# Altium PCB Resonate.PcbDoc
Units mil, origin at the board's own origin, x right, y up, seen from the top; angles counter-clockwise.
Board outline 3841 x 2404 mil, 2 copper layers (Top Layer, Bottom Layer); 119 components, 60 nets, 316 pads, 93 vias.
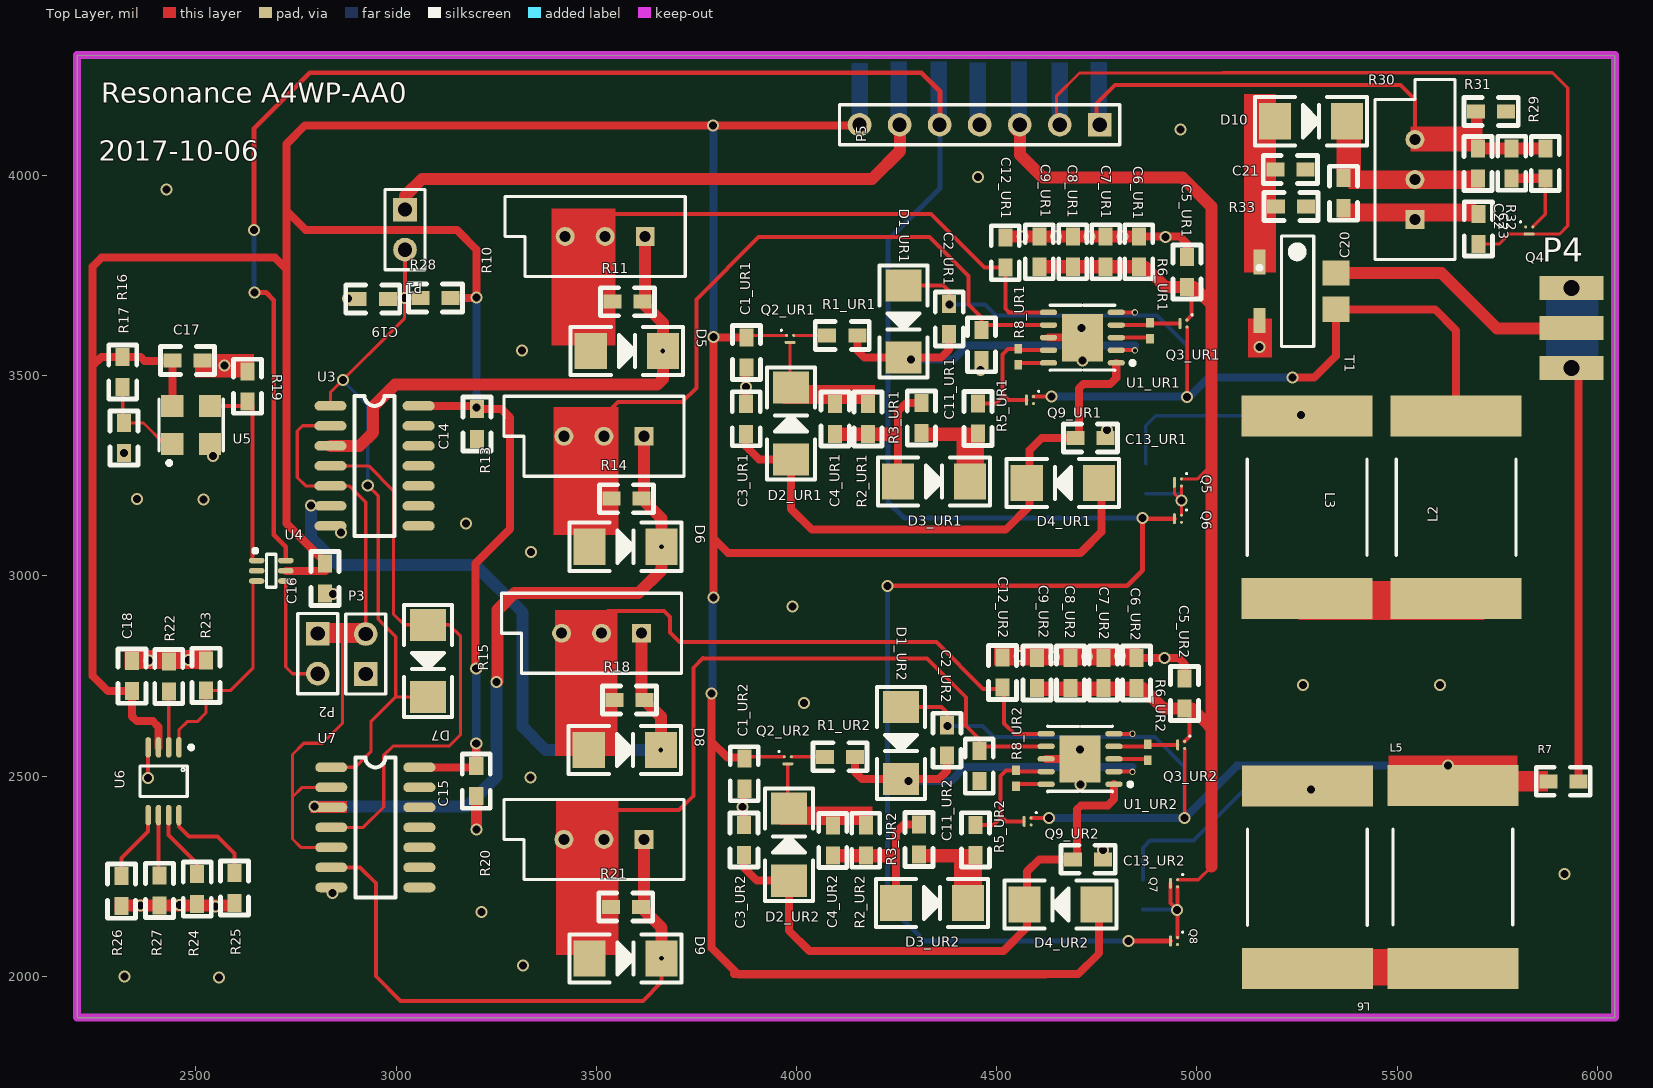
[diagram p0: Top Layer view]
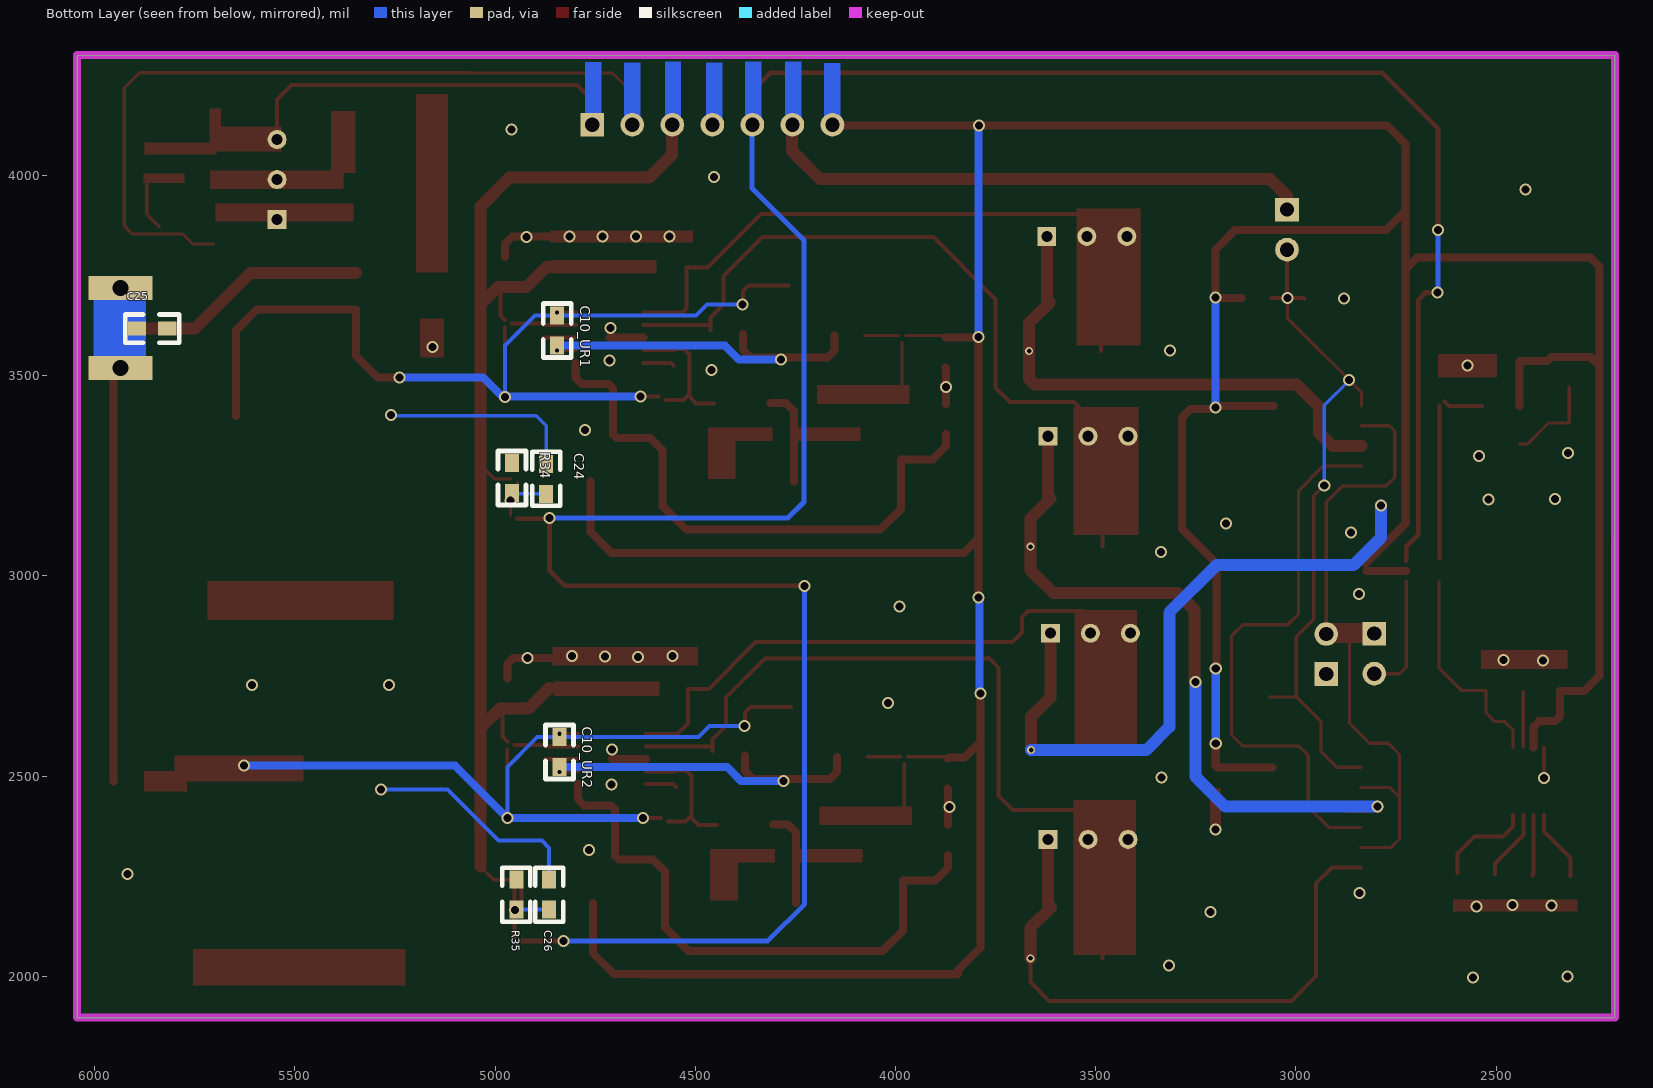
[diagram p1: Bottom Layer view, seen from below]

## Layer stack, top to bottom
Top Layer: signal copper 1.4
Dielectric: dielectric 12.6, FR-4, Dk 4.8
Bottom Layer: signal copper 1.4

## Board outline
2203,4301 2203,1899 2205,1897 6044,1897 6044,4299

## Design rules (kind name [scope] priority, off if disabled: settings)
Clearance [All] p1: gap=6
ComponentClearance [All] p1: gap=0 collisioncheckmode=3 verticalgap=0 showdistances=FALSE
HoleToHoleClearance [All] p1: gap=4 allowstackedmicrovias=TRUE
MinimumSolderMaskSliver [All] p1: minsoldermaskwidth=3
PolygonConnect [All] p1: connectstyle=Relief reliefconductorwidth=10 reliefentries=4 polygonreliefangle="90 Angle"
RoutingVias [All] p1: holewidth=10 width=16 viastyle="Through Hole" minholewidth=8 minwidth=10 maxholewidth=28 maxwidth=50
SilkToSilkClearance [All] p1: silktosilkclearance=0
SilkscreenOverComponentPads [All] p1: minsilkscreentomaskgap=0
SolderMaskExpansion [All] p1: expansion=4
Width [All] p1: maxlimit=50 minlimit=6 preferedwidth=10
23 further rules are at their usual default settings.

## Classes and differential pairs
component class U_Oscillating: C14 C15 C16 C17 C18 C19 D5 D6 D7 D8 D9 P1 P2 P3 R10 R11 R13 R14 R15 R16 R17 R18 R19 R20 R21 R22 R23 R24 R25 R26 R27 R28 U3 U4 U5 U6 U7
component class Resonance-AA0: C20 C21 C22 C23 C24 C25 C26 D10 L2 L3 L5 L6 P4 P5 Q4 Q5 Q6 Q7 Q8 R7 R29 R30 R31 R32 R33 R34 R35 T1
channel class GateDriverAndPowerDevices: UR1_ UR2_
component class UR1: C1_UR1 C2_UR1 C3_UR1 C4_UR1 C5_UR1 C6_UR1 C7_UR1 C8_UR1 C9_UR1 C10_UR1 C11_UR1 C12_UR1 C13_UR1 D1_UR1 D2_UR1 D3_UR1 D4_UR1 Q2_UR1 Q3_UR1 Q9_UR1 R1_UR1 R2_UR1 R3_UR1 R5_UR1 R6_UR1 R8_UR1 U1_UR1
component class UR2: C1_UR2 C2_UR2 C3_UR2 C4_UR2 C5_UR2 C6_UR2 C7_UR2 C8_UR2 C9_UR2 C10_UR2 C11_UR2 C12_UR2 C13_UR2 D1_UR2 D2_UR2 D3_UR2 D4_UR2 Q2_UR2 Q3_UR2 Q9_UR2 R1_UR2 R2_UR2 R3_UR2 R5_UR2 R6_UR2 R8_UR2 U1_UR2

## Components (designator, comment, footprint, x,y, rotation, side; value= is the part's Value field where it differs from the comment)
C1_UR1 "100n/25V" 0603 3875.28,3560.93 r270 top (schematic designator C1)
C1_UR2 "100n/25V" 0603 3869.45,2508.55 r270 top (schematic designator C1)
C2_UR1 "100n/25V" 0603 4381.26,3639.54 r90 top (schematic designator C2)
C2_UR2 "100n/25V" 0603 4375.43,2587.16 r90 top (schematic designator C2)
C3_UR1 "100n/25V" 0603 3874.24,3390.11 r90 top (schematic designator C3)
C3_UR2 "100n/25V" 0603 3868.42,2337.74 r90 top (schematic designator C3)
C4_UR1 "22n/25V" 0603 4096.38,3394.34 r270 top (schematic designator C4)
C4_UR2 "22n/25V" 0603 4090.55,2341.96 r270 top (schematic designator C4)
C5_UR1 "1u/10V" 0603 4974.94,3761.48 r270 top (schematic designator C5)
C5_UR2 "1u/10V" 0603 4969.11,2709.1 r270 top (schematic designator C5)
C6_UR1 "1u/10V" 0603 4854.88,3812.29 r270 top (schematic designator C6)
C6_UR2 "1u/10V" 0603 4849.05,2759.92 r270 top (schematic designator C6)
C7_UR1 "1u/10V" 0603 4772.11,3812.29 r270 top (schematic designator C7)
C7_UR2 "1u/10V" 0603 4766.28,2759.92 r270 top (schematic designator C7)
C8_UR1 "1u/10V" 0603 4689.94,3812.29 r270 top (schematic designator C8)
C8_UR2 "1u/10V" 0603 4684.11,2759.92 r270 top (schematic designator C8)
C9_UR1 "1u/10V" 0603 4606.27,3812.29 r270 top (schematic designator C9)
C9_UR2 "1u/10V" 0603 4600.44,2759.92 r270 top (schematic designator C9)
C10_UR1 "1u/10V" 0603 4844.85,3610.29 r90 bottom (schematic designator C10)
C10_UR2 "1u/10V" 0603 4839.02,2557.92 r90 bottom (schematic designator C10)
C11_UR1 "22p/50V" 0603 4462.16,3579.9 r270 top (schematic designator C11)
C11_UR2 "22p/50V" 0603 4456.33,2527.52 r270 top (schematic designator C11)
C12_UR1 "22p/50V" 0603 4521.33,3804.95 r90 top (schematic designator C12)
C12_UR2 "22p/50V" 0603 4514.7,2756.7 r90 top (schematic designator C12)
C13_UR1 "1u/10V" 0603 4731.59,3344.76 r0 top (schematic designator C13)
C13_UR2 "1u/10V" 0603 4725.76,2292.38 r0 top (schematic designator C13)
C14 "100n/50V" 0603 3202,3377 r90 top
C15 "100n/50V" 0603 3200,2485 r90 top
C16 "100n/50V" 0603 2822,2991 r90 top
C17 "100n/50V" 0603 2481,3538 r180 top
C18 "100n/50V" 0603 2340.08,2752.27 r270 top
C19 "22p/50V" 0603 2944,3692 r180 top
C20 "1n/50V" 0603 5366.34,3953.41 r90 top
C21 "680p/50V" 0603 5230.77,4015.09 r0 top
C22 "82n/16V" 0603 5786.1,4028.18 r90 top
C23 "1n/50V" 0603 5702.89,3869.5 r270 top
C24 "1u/50V" 0603 4872.24,3245.2 r270 bottom
C25 "JMP 1" 0603 5858.79,3617.69 r180 bottom
C26 "1u/50V" 0603 4864.87,2206.46 r270 bottom
D1_UR1 "Diode BAS70" SMA 4267.14,3725.12 r270 top (schematic designator D1)
D1_UR2 "Diode BAS70" SMA 4261.31,2672.75 r270 top (schematic designator D1)
D2_UR1 "Diode" SMA 3986.51,3291.17 r90 top (schematic designator D2)
D2_UR2 "Diode" SMA 3980.69,2238.8 r90 top (schematic designator D2)
D3_UR1 "Diode" SMA 4253.73,3235.91 r0 top (schematic designator D3)
D3_UR2 "Diode" SMA 4247.9,2183.53 r0 top (schematic designator D3)
D4_UR1 "Diode" SMA 4754.97,3232.03 r180 top (schematic designator D4)
D4_UR2 "Diode" SMA 4749.14,2179.65 r180 top (schematic designator D4)
D5 "Diode" SMA 3486,3562 r0 top
D6 "Diode" SMA 3483,3073 r0 top
D7 "Diode" SMA 3079,2878 r270 top
D8 "Diode" SMA 3481,2565 r0 top
D9 "Diode" SMA 3483,2045 r0 top
D10 "Diode" SMA 5194.66,4135.72 r0 top
L2 "Inductor" INDP12274X23N 5647.4,3171.71 r90 top
L3 "Inductor" INDP12274X23N 5275.16,3171.71 r270 top
L5 "Inductor" INDP12274X23N 5639.26,2248.05 r90 top
L6 "Inductor" INDP12274X23N 5275.75,2247.5 r270 top
P1 "Header 2" HDR1X2 3022,3915 r270 top
P2 "Header 2" HDR1X2 2804,2856 r270 top
P3 "Header 2" HDR1X2 2924,2755 r90 top
P4 "SMB" CONSMA003.062 5935.88,3619.8 r0 top
P5 "Header 7" HDR1X7 4757.31,4126.96 r180 top
Q2_UR1 "EPC2038" BGA100P9X9-81A 3983.97,3591.98 r0 top (schematic designator Q2)
Q2_UR2 "EPC2038" BGA100P9X9-81A 3978.14,2539.61 r0 top (schematic designator Q2)
Q3_UR1 "EPC2036" BGA100P9X9-81A 4966.41,3630.54 r270 top (schematic designator Q3)
Q3_UR2 "EPC2036" BGA100P9X9-81A 4960.58,2578.16 r270 top (schematic designator Q3)
Q4 "EPC2038" BGA100P9X9-81A 5830.04,3862.88 r0 top
Q5 "EPC2036" BGA100P9X9-81A 4952.54,3233.65 r270 top
Q6 "EPC2036" BGA100P9X9-81A 4952.61,3142.93 r270 top
Q7 "EPC2036" BGA100P9X9-81A 4942.77,2232.42 r270 top
Q8 "EPC2036" BGA100P9X9-81A 4942.68,2088.43 r270 top
Q9_UR1 "EPC2036" BGA100P9X9-81A 4582.95,3439.33 r270 top (schematic designator Q9)
Q9_UR2 "EPC2036" BGA100P9X9-81A 4577.12,2386.95 r270 top (schematic designator Q9)
R1_UR1 "Res1" 0603 4116.63,3600.63 r180 top (schematic designator R1)
R1_UR2 "Res1" 0603 4110.8,2548.26 r180 top (schematic designator R1)
R2_UR1 "Res1" 0603 4178.72,3389.76 r90 top (schematic designator R2)
R2_UR2 "Res1" 0603 4172.89,2337.38 r90 top (schematic designator R2)
R3_UR1 "Res1" 0603 4311.66,3391.83 r90 top (schematic designator R3)
R3_UR2 "Res1" 0603 4305.83,2339.45 r90 top (schematic designator R3)
R5_UR1 "Res1" 0603 4452.85,3390.75 r90 top (schematic designator R5)
R5_UR2 "Res1" 0603 4447.02,2338.37 r90 top (schematic designator R5)
R6_UR1 "Res1" 0402 4882.85,3612.29 r90 top (schematic designator R6)
R6_UR2 "Res1" 0402 4877.02,2559.92 r90 top (schematic designator R6)
R7 "Res1" 0603 5912.51,2487.13 r0 top
R8_UR1 "Res1" 0402 4553.85,3547.29 r90 top (schematic designator R8)
R8_UR2 "Res1" 0402 4548.02,2494.92 r90 top (schematic designator R8)
R10 "RPot" VR5 3522,3848 r180 top
R11 "" 0603 3575,3685 r0 top
R13 "RPot" VR5 3519,3349 r180 top
R14 "" 0603 3573,3193 r0 top
R15 "RPot" VR5 3513,2857 r180 top
R16 "Res1" 0603 2317,3507 r90 top
R17 "NC" 0603 2320,3342 r90 top
R18 "" 0603 3580,2690 r0 top
R19 "Res1" 0603 2628.97,3476.24 r270 top
R20 "RPot" VR5 3519,2342 r180 top
R21 "" 0603 3571,2173 r0 top
R22 "" 0603 2432.08,2751.27 r270 top
R23 "Res1" 0603 2525.08,2754.27 r270 top
R24 "" 0603 2503.08,2215.27 r90 top
R25 "" 0603 2596.08,2218.27 r90 top
R26 "" 0603 2314.08,2210.27 r90 top
R27 "" 0603 2409.08,2212.27 r90 top
R28 "Res1" 0603 3096,3694 r0 top
R29 "Res1" 0603 5702.27,4027.53 r90 top
R30 "RPot" VR5 5544.42,3990.15 r90 top
R31 "Res1" 0603 5732.42,4159.82 r0 top
R32 "Res1" 0603 5870.12,4032.88 r270 top
R33 "Res1" 0603 5237.26,3923.08 r180 top
R34 "Res1" 0603 4957.52,3247.26 r270 bottom
R35 "Res1" 0603 4946.98,2206.46 r270 bottom
T1 "Trans Cupl" SOIC127P590X175-4N 5251.56,3711.21 r0 top
U1_UR1 "LM5113TM" QFN80P400X400X80-10N 4713.85,3595.29 r180 top (schematic designator U1)
U1_UR2 "LM5113TM" QFN80P400X400X80-10N 4708.02,2542.92 r180 top (schematic designator U1)
U3 "74LS00" SO-14 2836,3425 r0 top
U4 "74LS157" TSOP65P220X100-6N 2688,3013 r0 top
U5 "SG-8002" SOT192P240X120-4N 2488,3377 r90 top
U6 "DS1090" TSOP65P490X100-8N 2419.08,2487.27 r270 top
U7 "74LS08" SO-14 2838,2522 r0 top

## Footprints (in the part's own frame and the unit in brackets; to place one, negate y for a bottom-side part, rotate by r counter-clockwise, add the part's x,y. Pads: shape width x height; smd on the part's side, far side on the other; paste and mask are expansions set on the pad)
0402 [mm] "Chip Capacitor, Body 1.0x0.5mm, IPC High Density"
  rect 0.6x0.5 smd: 1(-0.5,0) 2(0.5,0)
  body extent -0.55,-0.3 0.55,0.3, height 1.3
0603 [mil]
  rect 45x35 smd: 1(-35,0) 2(40,0)
  silkscreen extent -65,-35 70,35
BGA100P9X9-81A [mm]
  round 0.19 smd mask+0.05: 1(-0.225,0.225)
  oval 0.7x0.19 smd mask+0.05: 2(-0.001,-0.223)
  round 0.19 smd paste+0 mask+0.05: 3(0.225,0.225)
  silkscreen extent -0.6,0.5 -0.51,0.6
CONSMA003.062 [mil] "SMAÁ¬»"
  rect 159.84x60 hole 40: 1(0,-100) 1(0,100)
  rect 159.84x60 smd: 2(0,0)
HDR1X2 [mm] "Connector; Header; 2 Position"
  rect 1.5x1.5 hole 0.9: 1(0,0)
  round 1.5 hole 0.9: 2(2.54,0)
  silkscreen extent -1.27,-1.27 3.81,1.27
HDR1X7 [mm] "Connector; Header; 7 Position"
  rect 1.5x1.5 hole 0.9: 1(0,0)
  round 1.5 hole 0.9: 2(2.54,0) 3(5.08,0) 4(7.62,0) 5(10.16,0) 6(12.7,0) 7(15.24,0)
  silkscreen extent -1.27,-1.27 16.51,1.27
INDP12274X23N [mm] "Precision Wire Wound Inductor, 2-Leads, Body 12.3x7.4mm, IPC Medium Density"
  rect 2.6x8.3 smd: 1(-5.8,0) 2(5.8,0)
  silkscreen extent -3.05,-3.8 3.05,3.8, body extent -6.25,-3.8 6.25,3.8, height 2.29
QFN80P400X400X80-10N [mm] "QFN, 10-Leads, Body 4.1x4.1mm (max), Pitch 0.80mm, IPC Medium Density"
  oval 1.1x0.35 smd: 1(-2.15,1.6) 2(-2.15,0.8) 3(-2.15,0) 4(-2.15,-0.8) 5(-2.15,-1.6) 6(2.15,-1.6) 7(2.15,-0.8) 8(2.15,0) 9(2.15,0.8) 10(2.15,1.6)
  rect 2.6x3 smd: 11(0,0)
  silkscreen extent -3.31,-2.07 2.05,2.08, body extent -2.05,-2.05 2.05,2.05, height 0.8
SMA [mil]
  rect 80x90 smd: 1(0,0) 2(180,0)
  silkscreen extent -50,-60 230,60
SO-14 [mil]
  oval 80x24 smd: 1(0,0) 2(0,-50) 3(0,-100) 4(0,-150) 5(0,-200) 6(0,-250) 7(0,-300) 8(220,-300) 9(220,-250) 10(220,-200) 11(220,-150) 12(220,-100) 13(220,-50) 14(220,0)
  silkscreen extent 60,-325 160,25
SOIC127P590X175-4N [mm] "SOIC, 4-Leads, Body 7.0x5.2mm (max), Pitch 1.27mm, IPC Medium Density"
  rect 0.75x1.6 smd: 1(-2.425,1.85) 2(-2.425,-1.85)
  rect 1.7x1.6 smd: 3(2.425,-1.15) 4(2.425,1.15)
  silkscreen extent -2.55,-3.5 1.03,3.5, body extent -2.6,-3.5 2.6,3.5, height 1.75
SOT192P240X120-4N [mm] "SOT143, 4-Leads, Body 3.3x2.4mm (max), Pitc"
  rect 1.4x1.4 smd: 1(-1.2,1.2) 2(-1.2,-1.2) 3(1.2,-1.2) 4(1.2,1.2)
  silkscreen extent -2.54,-2.03 1.65,2.03, body extent -1.65,-1.65 1.65,1.65, height 1.2
TSOP65P220X100-6N [mm] "TSOP, 6-Leads, Body 2.1x1.3mm (max), Pitc"
  oval 1x0.35 smd: 1(-0.925,0.65) 2(-0.925,0) 3(-0.925,-0.65) 4(0.925,-0.65) 5(0.925,0) 6(0.925,0.65)
  silkscreen extent -1.14,-1.05 0.3,1.39, body extent -0.65,-1.05 0.65,1.05, height 1
TSOP65P490X100-8N [mm] "TSOP, 8-Leads, Body 3.0x3.0mm (max), Pitch 0.65mm, IPC"
  oval 1.3x0.35 smd: 1(-2.15,0.975) 2(-2.15,0.325) 3(-2.15,-0.325) 4(-2.15,-0.975) 5(2.15,-0.975) 6(2.15,-0.325) 7(2.15,0.325) 8(2.15,0.975)
  silkscreen extent -2.27,-1.5 0.97,1.88, body extent -1.5,-1.5 1.5,1.5, height 1
VR5 [mm] "Thru-Hole; 3 Leads"
  rect 1.2x1.2 hole 0.7: 1(-2.54,0)
  round 1.2 hole 0.7: 2(0,0) 3(2.54,0)
  silkscreen extent -5.08,-2.54 6.35,2.54

## Part data
C1_UR1 C1_UR2 C2_UR1 C2_UR2 C3_UR1 C3_UR2 C4_UR1 C4_UR2 C5_UR1 C5_UR2 C6_UR1 C6_UR2 C7_UR1 C7_UR2 C8_UR1 C8_UR2 C9_UR1 C9_UR2 C10_UR1 C10_UR2 C11_UR1 C11_UR2 C12_UR1 C12_UR2 C13_UR1 C13_UR2 C14 C15 C16 C17 C18 C19 C20 C21 C22 C23 C24 C25 C26: library part CAP1, "Capacitor"
D1_UR1 D1_UR2: "Silicon AF Schottky Diode for High-Speed Switching"
D2_UR1 D2_UR2 D3_UR1 D3_UR2 D4_UR1 D4_UR2 D5 D6 D7 D8 D9 D10: "Default Diode"
P1 P2 P3: "Header, 2-Pin"
P4: "SMB Straight Connector"
P5: "Header, 7-Pin"
Q2_UR1 Q2_UR2 Q3_UR1 Q3_UR2 Q4 Q5 Q6 Q7 Q8 Q9_UR1 Q9_UR2: library part MOSFET-N, "N-Channel MOSFET"
R1_UR1 R1_UR2 R2_UR1 R2_UR2 R3_UR1 R3_UR2 R5_UR1 R5_UR2 R6_UR1 R6_UR2 R7 R8_UR1 R8_UR2 R16 R19 R23 R28 R29 R31 R32 R33 R34 R35: "Resistor"
R10 R13 R15 R20 R30: "Potentiometer"
R11 R14 R17 R18 R21 R22 R24 R25 R26 R27: library part Res1, "Resistor"
T1: "Transformer (Coupled Inductor Model)"

## Via types
v1: diameter 30, hole 20, Top Layer to Bottom Layer, 85 vias
v2: diameter 20, hole 12, Top Layer to Bottom Layer, 4 vias
v3: diameter 16, hole 10, Top Layer to Bottom Layer, 4 vias

## Nets (pads, with @x,y where several pads share a name; then routed paths per layer and width w, separated by ;. In a path a pad name is that pad's centre, name@x,y a point inside that pad or via, vN(x,y) a via of type N, cw(c..) or ccw(c..) an arc to the next point about the centre after c; other vN are vias at no path point)
4.7V_UR1: C3_UR1.1 C13_UR1.1 D2_UR1.1 D4_UR1.2 U1_UR1.1 | length 1446.2
  Top Layer w20: C3_UR1.1 3874.24,3323.72 3906.8,3291.17 D2_UR1.1 3986.51,3167.25 4038.24,3115.52 4522.33,3115.52 4581.73,3174.92 4581.73,3314.08 4612.41,3344.76 C13_UR1.1 ; C13_UR1.1@4705.83,3352.54 4705.83,3468.71 4716.77,3479.65 4783.37,3479.65 4798.49,3494.77 U1_UR1.1
4.7V_UR2: C3_UR2.1 C13_UR2.1 D2_UR2.1 D4_UR2.2 U1_UR2.1 | length 1446.2
  Top Layer w20: C3_UR2.1 3868.42,2271.35 3900.97,2238.8 D2_UR2.1 3980.69,2114.87 4032.41,2063.15 4516.5,2063.15 4575.9,2122.55 4575.9,2261.7 4606.58,2292.38 C13_UR2.1 ; C13_UR2.1@4700,2300.16 4700,2416.33 4710.94,2427.28 4777.54,2427.28 4792.66,2442.39 U1_UR2.1
5V: C1_UR1.1 C1_UR2.1 C14.2 C15.2 C16.2 C17.2 C18.2 D4_UR1.1 D4_UR2.1 P5.7 Q2_UR1.1 Q2_UR2.1 R16.2 R28.2 U3.14 U4.5 U5.4 U6.3 U7.14 | length 12535.5
  Top Layer w8: C1_UR2.1 3874.36,2548.46 Q2_UR2.1 ; C1_UR1.1 3880.19,3600.84 Q2_UR1.1
  Top Layer w20: U6.3 2406.29,2623.06 2392.08,2637.27 2352.08,2637.27 2340.08,2649.27 C18.2 2280.08,2712.27 2242,2750.35 2242,3525 ; U5.4 2440.76,3535.24 2439,3537 2372,3537 2362,3547 R16.2 2264,3547 2242,3525 ; U4.5 C16.2@2824,3013 ; C16.2@2826,3031 2726,3131 2726,3766 ; U3.14 C14.2@3196,3425 ; U7.14 C15.2@3197,2522 ; R28.2 v1@3200,3694 ; v1@3198,2771 3198,3031 3284,3117 3284,3396 3263,3417 C14.2 ; C15.2 v1(3200,2581) ; v1(3201,3695) 3201,3815 3152,3864 2774,3864 2726,3912 ; v1(3788,2707) 3788,2585.49 ; v1(3792,2946) 3792,3094.94 ; 3844.25,2005.31 3853.69,2005.31 ; C1_UR2.1 3866.74,2546.26 3827.23,2546.26 3788,2585.49 ; C1_UR1.1 3793.07,3595.93 v1(3792,3597) 3792,3094.94 ; P5.7@4163.5,4124.91 3829.78,4124.91 3829.73,4124.86 2771.86,4124.86 2726,4079 2726,3912 ; 4622,2004 3855,2004 3853.69,2005.31 ; D4_UR2.1@4755.9,2183.44 4755.9,2057.91 4703.3,2005.31 3853.69,2005.31 ; D4_UR1.1@4761.73,3235.82 4761.73,3110.29 4709.13,3057.69 3829.26,3057.69 3792,3094.94 ; 2242,3525 2242,3773 2264,3795 2697,3795 2726,3766 ; 2726,3766 2726,3912 ; 3788,2585.49 3788,2071 3853.69,2005.31
  Bottom Layer w20: v1(3200,2581) v1(3200,2769) ; v1(3201,3421) v1@3201,3686 ; v1(3788,2707) 3790,2709 3790,2944 v1(3792,2946) ; v1(3792,3597) v1@3792,4124.8
  other v1: 3791.66,4124.8
5VHS_UR1: C2_UR1.1 C10_UR1.1 D1_UR1.2 R1_UR1.1 U1_UR1.2 | length 942.1
  Top Layer w10: U1_UR1.2 4844.34,3563.8 v3(4844.85,3563.29)
  Top Layer w20: R1_UR1.1 4151.63,3562.91 4169.42,3545.12 D1_UR1.2 4361.07,3545.12 4381.26,3565.31 C2_UR1.1
  Bottom Layer w20: v1(4286.04,3540.48) 4391.34,3540.48 4426.15,3575.29 C10_UR1.1
5VHS_UR2: C2_UR2.1 C10_UR2.1 D1_UR2.2 R1_UR2.1 U1_UR2.2 | length 942.1
  Top Layer w10: U1_UR2.2 4838.51,2511.42 v3(4839.02,2510.92)
  Top Layer w20: R1_UR2.1 4145.8,2510.53 4163.59,2492.75 D1_UR2.2 4355.24,2492.75 4375.43,2512.93 C2_UR2.1
  Bottom Layer w20: v1(4280.21,2488.1) 4385.51,2488.1 4420.33,2522.92 C10_UR2.1
A4WPMODE: P5.5 Q6.2 Q8.2 U4.6 | length 7063.5
  Top Layer w12: v1@2637,3708 v1(2646,3708) 2675,3708 2694,3689 2694,3103 2724.42,3072.58 U4.6 ; v1(2645,3864) 2645,4118 2784,4257 4311.9,4257 4358.26,4210.64 P5.5@4358.26,4117.21 ; v1(4226.86,2975.42) 4825.54,2975.42 4864.2,3014.08 4864.2,3142.97 4866.08,3142.97 v1(4864.2,3144.85) ; v1(4829.55,2088.4) 4933.82,2088.4 Q8.2 ; v1@4867.51,3142.97 Q6.2
  Bottom Layer w12: v1(2645,3864) 2645,3709 v1(2646,3708) ; v1(4226.86,2975.42) 4226.86,2180.5 4318.96,2088.4 v1(4829.55,2088.4) ; P5.5@4358.26,4117.21 4358.26,3967.86 4228.45,3838.06 4228.45,3184.77 4268.37,3144.85 v1(4864.2,3144.85)
GH_UR1: Q3_UR1.2 R6_UR1.2 U1_UR1.4 | length 154
  Top Layer w10: U1_UR1.4 R6_UR1.2@4877.66,3626.79 ; R6_UR1.2 4884.1,3630.72 Q3_UR1.2@4957.14,3630.72
GH_UR2: Q3_UR2.2 R6_UR2.2 U1_UR2.4 | length 154
  Top Layer w10: U1_UR2.4 R6_UR2.2@4871.83,2574.41 ; R6_UR2.2 4878.27,2578.34 Q3_UR2.2@4951.31,2578.34
GL_UR1: Q9_UR1.2 R5_UR1.2 R8_UR1.2 U1_UR1.9 | length 360.5
  Top Layer w10: R5_UR1.2 4497.7,3430.75 4514.85,3447.89 4514.85,3454.37 ; R8_UR1.2@4553.85,3564.98 4555.03,3563.8 U1_UR1.9 ; R8_UR1.2 4528.53,3566.98 4514.85,3553.29 4514.85,3454.37 ; Q9_UR1.2 4529.84,3439.37 4514.85,3454.37
GL_UR2: Q9_UR2.2 R5_UR2.2 R8_UR2.2 U1_UR2.9 | length 360.5
  Top Layer w10: R5_UR2.2 4491.88,2378.37 4509.02,2395.51 4509.02,2401.99 ; R8_UR2.2@4548.02,2512.6 4549.2,2511.42 U1_UR2.9 ; R8_UR2.2 4522.7,2514.6 4509.02,2500.92 4509.02,2401.99 ; Q9_UR2.2 4524.01,2386.99 4509.02,2401.99
GND: C1_UR1.2 C1_UR2.2 C3_UR1.2 C3_UR2.2 C5_UR1.1 C5_UR2.1 C6_UR1.1 C6_UR2.1 C7_UR1.1 C7_UR2.1 C8_UR1.1 C8_UR2.1 C9_UR1.1 C9_UR2.1 C11_UR1.2 C11_UR2.2 C12_UR1.2 C12_UR2.2 C13_UR1.2 C13_UR2.2 C14.1 C15.1 C16.1 C17.1 C18.1 C19.2 C20.1 C21.2 C23.1 C25.2 P3.1 P5.4 Q4.1 Q6.3 Q8.3 Q9_UR1.3 Q9_UR2.3 R17.1 R19.1 R22.1 R23.1 R24.1 R25.1 R26.1 R27.1 R30.1 R31.2 R33.1 R34.1 R35.1 T1.2 U1_UR1.8 U1_UR1.11 U1_UR2.8 U1_UR2.11 U3.7 U4.2 U5.2 U6.4 U7.7 | length 751.9
  Top Layer w10: v1(2379.71,2495.14) 2380.7,2496.13 U6.4
  Top Layer w20: C3_UR2.2 3868.42,2467.52 C1_UR2.2 ; C3_UR1.2 3874.24,3519.9 C1_UR1.2 ; U1_UR2.8 U1_UR2.11 ; U1_UR1.8 U1_UR1.11 ; C6_UR2.1 4954.47,2794.92 4969.11,2780.28 C5_UR2.1 ; C6_UR1.1 4957.45,3847.29 4974.94,3829.81 C5_UR1.1
  other v1: 2557.27,1996.8 2321.92,1999.23 3316.34,2026.97 2548.29,2174.94 2361.62,2176.78 2459.31,2177.7 2840.51,2207.94 5918.63,2256.06 4765.38,2315.32 3200.08,2366.79 3865.42,2422.81 4709.56,2479.1 4707.9,2566.23 4018.86,2682.5 5264.48,2727.42 5607.14,2727.42 2382.88,2788.81 2481.43,2789.84 4918.59,2795.03 4642.57,2798.06 4725.32,2798.56 4556.3,2799.57 4807.55,2799.57 3989.8,2923.13 2842.47,2955.15 3337,3059.57 2862.03,3108.33 3173.95,3131.33 2518.62,3190.39 2542.63,3300.23 2320,3307 4775.39,3364.56 3873.77,3472.45 4459.74,3514.54 2571.24,3526.14 4714.58,3538.12 3314.42,3563.48 5155.73,3571.83 4711.83,3619.3 2880.22,3693.23 4921.57,3847.16 4563.86,3847.95 4648.12,3848.46 4731.36,3848.46 4813.6,3848.46 2426.26,3965.72 4453.47,3996.02 4958.94,4115.67
H_SIG1: C12_UR1.1 D5.1 R10.2 R10.3 R11.1 U1_UR1.6 | length 1732
  Top Layer w10: R10.3 R10.2 ; D5.1 3486,3631 R11.1 3540,3770 3522,3788 R10.2 ; U1_UR1.6 4530.59,3658.29 4521.33,3667.55 C12_UR1.1 4469.87,3769.95 4335.82,3904 3692,3904 3537,3904 3522,3889 R10.2
H_SIG2: C12_UR2.1 D8.1 R15.2 R15.3 R18.1 U1_UR2.6 | length 1789.6
  Top Layer w10: R15.3 R15.2 ; D8.1 3481,2626 R18.1 3545,2764 3513,2796 R15.2 ; U1_UR2.6 4543.83,2605.91 4518.6,2631.14 4518.6,2717.8 4466.27,2717.8 4349.07,2835 3708,2835 3684,2859 3684,2898 3669,2913 3529,2913 3513,2897 R15.2
HFOSC: R19.2 U4.1 U5.3 | length 480.9
  Top Layer w10: U5.3 2616.97,3424.24 R19.2 ; U4.1@2640.79,3043.57 R19.2@2640.79,3425.81
ICOIL: C22.2 P5.1 R29.2 R30.3 R31.1 R32.1 | length 992.7
  Top Layer w10: P5.1@4748.89,4116.43 4748.89,4179.63 4795.35,4226.09 5508.26,4226.09 5544.42,4189.93 R30.3
INTOSC: P2.2 U4.4 | length 301.3
  Top Layer w8: U4.4 2724.42,2772.58 2741,2756 P2.2
L_SIG1: C11_UR1.1 D6.1 R13.2 R13.3 R14.1 U1_UR1.7 | length 2036.9
  Top Layer w10: R13.3 R13.2 ; D6.1 3483,3138 R14.1 3538,3248 3519,3267 R13.2 ; C11_UR1.1 C11_UR1.1@4462.16,3626.79 ; U1_UR1.7 C11_UR1.1@4462.16,3626.79 ; R13.2 3519,3399 3554,3434 3714,3434 3750,3470 3750,3691 3905.55,3846.55 4331.75,3846.55 4429.66,3748.64 4429.66,3677.53 4462.16,3645.03 C11_UR1.1@4462.16,3626.79
L_SIG2: C11_UR2.1 D9.1 R20.2 R20.3 R21.1 U1_UR2.7 | length 2085.4
  Top Layer w10: R20.3 R20.2 ; D9.1 3483,2120 R21.1 3536,2255 3519,2272 R20.2 ; C11_UR2.1 C11_UR2.1@4456.33,2574.41 ; U1_UR2.7 C11_UR2.1@4456.33,2574.41 ; R20.2 3519,2385 3549,2415 3706,2415 3742,2451 3742,2770 3766.68,2794.68 3767.2,2794.17 4325.92,2794.17 4423.83,2696.27 4423.83,2625.16 4456.33,2592.66 C11_UR2.1@4456.33,2574.41
LFOSC: R23.2 U4.3 U6.1 | length 541.4
  Top Layer w8: U6.1 2457.47,2615.65 2478.08,2636.27 2503.08,2636.27 2525.08,2658.27 R23.2 2586.75,2714.27 2642.19,2769.7 U4.3@2642.19,2986.07
MOD: C19.1 D7.2 P1.2 R28.1 U3.1 U7.1 | length 1739.8
  Top Layer w8: U3.1 2836,3459 3021,3644 v1(3021,3694) 3021,3703 v1@3022,3704 ; U7.1 2898,2522 2937,2561 2937,2636 2999,2698 ; v1(2929,3226) 2955,3200 2955,2892.2 2999,2848.2 2999,2698 ; D7.2@3065,2698 2999,2698
  Top Layer w10: C19.1 2981,3694 v1(3021,3694) R28.1 ; v1@3022,3704 P1.2
  Bottom Layer w8: v1@2866,3489 2929,3426 v1(2929,3226)
  other v1: 2867,3490
NCLR: P1.1 P5.6 | length 1372.7
  Top Layer w30: P1.1 3022,3949 3065,3992 4188.91,3992 4258.26,4061.34 P5.6@4258.26,4117.21
NetC4_UR1_1: C4_UR1.1 D2_UR1.2 Q2_UR1.2 R2_UR1.2 | length 113.1
  Top Layer w8: D2_UR1.2@3983.92,3473.77 Q2_UR1.2
  Top Layer w10: D2_UR1.2@3983.92,3473.77 D2_UR1.2
NetC4_UR1_2: C4_UR1.2 D3_UR1.1 R2_UR1.1 R3_UR1.2 | length 400
  Top Layer w20: C4_UR1.2 4250.52,3354.34 4253.31,3351.55 ; D3_UR1.1 4253.73,3411.44 4274.12,3431.83 R3_UR1.2
NetC4_UR2_1: C4_UR2.1 D2_UR2.2 Q2_UR2.2 R2_UR2.2 | length 113.1
  Top Layer w8: D2_UR2.2@3978.09,2421.39 Q2_UR2.2
  Top Layer w10: D2_UR2.2@3978.09,2421.39 D2_UR2.2
NetC4_UR2_2: C4_UR2.2 D3_UR2.1 R2_UR2.1 R3_UR2.2 | length 400
  Top Layer w20: C4_UR2.2 4244.69,2301.96 4247.48,2299.17 ; D3_UR2.1 4247.9,2359.06 4268.29,2379.45 R3_UR2.2
NetC20_2: C20.2 D10.2 R29.1 R30.2
NetC21_1: C21.1 D10.1 R33.2 T1.1
NetC22_1: C22.1 Q4.3 R32.2 | length 134.1
  Top Layer w8: Q4.3 5870.12,3902.96 R32.2
NetC24_1: C24.1 L3.1 | length 494.1
  Bottom Layer w8: C24.1 4872.24,3375.13 4897.52,3400.42 5259.14,3400.42 v1(5260.38,3401.65)
NetC24_2: C24.2 Q5.2 Q5.3 Q6.1 R34.2 | length 211.9
  Top Layer w8: Q5.2 4943.75,3205.97 v1(4961.46,3188.26) ; Q5.3 4961.46,3224.73 v1(4961.46,3188.26) ; Q6.1 v1(4961.46,3188.26)
  Bottom Layer w8: C24.2 4955.46,3205.2 R34.2
NetC25_1: C25.1 P4.1 R7.2 | length 1028.7
  Top Layer w20: R7.2 P4.1@5952.51,3515.81
NetC26_1: C26.1 L6.1 | length 559.3
  Bottom Layer w10: C26.1 4864.87,2321.03 4883.1,2339.25 4991.41,2339.25 5118.64,2466.48 v1(5284.3,2466.48)
NetC26_2: C26.2 Q7.2 Q7.3 Q8.1 R35.2 | length 282.5
  Top Layer w10: Q7.2 4933.98,2183.3 v1@4951.63,2165.65 ; Q8.1@4951.63,2097.26 v1@4951.63,2165.65 ; Q7.3 v1@4951.63,2165.65
  Bottom Layer w10: C26.2 R35.2
  other v1: 4950.6,2165.65
NetD3_UR1_2: D3_UR1.2 R3_UR1.1 R5_UR1.1
NetD3_UR2_2: D3_UR2.2 R3_UR2.1 R5_UR2.1
NetD5_2: D5.2 R10.1 R11.2 U3.3 | length 1317.3
  Top Layer w30: U3.3 2909,3325 2942,3358 2942,3423 2997,3478 3652,3478 3666,3492 v2(3666,3562) 3666,3632 3615,3683 R11.2 3622,3692 R10.1
NetD6_2: D6.2 R13.1 R14.2 U7.3 | length 1700.2
  Top Layer w30: v1@3253,2737 3253,2915 3295,2957 3605,2957 3663,3015 v2(3663,3073) 3663,3143 R14.2 ; R14.2@3619,3199 R13.1
  Bottom Layer w30: v1(2796,2424) 3176,2424 3251,2499 v1(3251,2735)
NetD8_2: D8.2 R15.1 R18.2 U3.6 | length 1653.4
  Top Layer w30: R15.1 3613,2697 R18.2 3661,2649 v2(3661,2565)
  Bottom Layer w30: v1(2787,3176) 2787,3096 2856,3027 3198,3027 3316,2909 3316,2623 3374,2565 v2(3661,2565)
NetD9_2: D9.2 R20.1 R21.2 U7.6 | length 1499.2
  Top Layer w10: U7.6 2910,2272 2949,2233 2949,2001 3011,1939 3616,1939 3663,1986 v2(3663,2045)
  Top Layer w30: R20.1 3619,2181 R21.2 3663,2121 v2(3663,2045)
NetL2_1: L2.1 L3.2
NetL5_1: L5.1 L6.2
NetP4_2: P4.2 T1.4 | length 658.3
  Top Layer w30: T1.4 5611.09,3756.49 5749.78,3617.81 5832,3617.81 ; 5817.36,3618.49 P4.2@5933.22,3618.49
NetQ2_UR1_3: Q2_UR1.3 R1_UR1.2 | length 83.9
  Top Layer w8: Q2_UR1.3 4076.43,3600.84 R1_UR1.2
NetQ2_UR2_3: Q2_UR2.3 R1_UR2.2 | length 83.9
  Top Layer w8: Q2_UR2.3 4070.6,2548.46 R1_UR2.2
NetR6_UR1_1: R6_UR1.1 U1_UR1.3 | length 81.7
  Top Layer w10: U1_UR1.3 R6_UR1.1@4880.16,3595.29
NetR6_UR2_1: R6_UR2.1 U1_UR2.3 | length 81.7
  Top Layer w10: U1_UR2.3 R6_UR2.1@4874.33,2542.92
NetR8_UR1_1: R8_UR1.1 U1_UR1.10 | length 78.1
  Top Layer w10: R8_UR1.1@4553.85,3525.61 4560.54,3532.3 U1_UR1.10
NetR8_UR2_1: R8_UR2.1 U1_UR2.10 | length 78.1
  Top Layer w10: R8_UR2.1@4548.02,2473.23 4554.71,2479.92 U1_UR2.10
NetR16_1: R16.1 R17.2 U5.1 | length 233.6
  Top Layer w8: R16.1 2317,3385 R17.2 2369,3382 2421.24,3329.76 U5.1
NetR22_2: R22.2 U6.2 | length 139.4
  Top Layer w8: U6.2 2432.08,2572.12 R22.2
NetR24_2: R24.2 U6.7 | length 176.8
  Top Layer w10: U6.7 2431.88,2353.47 2503.08,2282.27 R24.2
NetR25_2: R25.2 U6.8 | length 243.9
  Top Layer w10: U6.8 2457.47,2373.88 2482.08,2349.27 2554.08,2349.27 2596.08,2307.27 R25.2
NetR26_2: R26.2 U6.5 | length 179.9
  Top Layer w10: R26.2 2314.08,2295.27 2380.7,2361.88 U6.5
NetR27_2: R27.2 U6.6 | length 151.5
  Top Layer w10: U6.6 2406.29,2255.06 R27.2
NSD: D7.1 U3.4 U7.4 | length 1421.5
  Top Layer w8: U3.4 2931,3275 2993,3213 2993,2905 3020,2878 3132,2878 3161,2849 3161,2604 3132,2575 2992,2575 2969,2552 2969,2423 2918,2372 U7.4
OSC: P2.1 P3.2 U3.2 U3.5 U7.2 U7.5 | length 1655.4
  Top Layer w8: P2.1 2866,2856 ; U3.2 2766,3375 2753,3362 2753,3246 2774,3225 U3.5 2883,3225 2924,3184 P3.2 2923,2856 2866,2856 ; U7.5 2762,2322 2741,2343 2741,2448 ; U7.2 2765,2472 2741,2448 ; 2741,2448 2741,2554 2769,2582 2816,2582 2866,2632 2866,2856
OUT_UR1: C2_UR1.2 C10_UR1.2 D1_UR1.1 L2.2 Q3_UR1.3 Q9_UR1.1 T1.3 U1_UR1.5 | length 2596.6
  Top Layer w8: v1@4975.59,3447.4 Q3_UR1.3@4975.59,3621.66
  Top Layer w10: D1_UR1.1 4367.49,3725.12 4381.26,3711.36 C2_UR1.2 ; Q9_UR1.1 v1(4636.51,3448.19) ; U1_UR1.5 v3(4844.85,3658.29)
  Top Layer w20: v1(5238.8,3495.92) 5292.98,3495.92 5347.03,3549.97 T1.3 5594.25,3665.94 5647.4,3612.79 L2.2
  Bottom Layer w10: v1(4382.59,3677.54) 4470.62,3677.54 4497.87,3650.29 C10_UR1.2 ; C10_UR1.2@4835.85,3659.29 C10_UR1.2 ; v1(4975.26,3447.56) 4975.26,3448.19 4975.26,3575.53 4900.5,3650.29 C10_UR1.2
  Bottom Layer w20: v1(4636.51,3448.19) v1@4975.26,3448.19 ; v1(4975.26,3447.56) 4981.33,3447.56 5029.7,3495.92 v1(5238.8,3495.92)
OUT_UR2: C2_UR2.2 C10_UR2.2 D1_UR2.1 L5.2 Q3_UR2.3 Q9_UR2.1 R7.1 U1_UR2.5 | length 2243.2
  Top Layer w8: v1@4969.76,2395.02 Q3_UR2.3@4969.76,2569.28
  Top Layer w10: D1_UR2.1 4361.66,2672.75 4375.43,2658.98 C2_UR2.2 ; Q9_UR2.1 v1(4630.68,2395.81) ; U1_UR2.5 v3(4839.02,2605.92)
  Bottom Layer w10: v1(4376.77,2625.16) 4464.79,2625.16 4492.04,2597.92 C10_UR2.2 ; C10_UR2.2@4830.02,2606.92 C10_UR2.2 ; v1(4969.43,2395.18) 4969.43,2395.81 4969.43,2523.15 4894.67,2597.92 C10_UR2.2
  Bottom Layer w20: v1(4630.68,2395.81) v1@4969.43,2395.81 ; v1(4969.43,2395.18) 5100.56,2526.3 v1(5626.99,2526.3)
QIMODE: C23.2 P5.2 Q4.2 | length 1985.9
  Top Layer w8: P5.2@4648.89,4116.43 4648.89,4198.29 4706.73,4256.14 5063.12,4256.14 5064,4257.01 5888.09,4257.01 5926.41,4218.69 5926.41,3874.64 5905.86,3854.09 Q4.2 5780.3,3854.09 5755.72,3829.5 C23.2
VAMP: C5_UR1.2 C5_UR2.2 C6_UR1.2 C6_UR2.2 C7_UR1.2 C7_UR2.2 C8_UR1.2 C8_UR2.2 C9_UR1.2 C9_UR2.2 P5.3 Q3_UR1.1 Q3_UR2.1 Q5.1 Q7.1 | length 3046.2
  Top Layer w8: Q7.1 5003.72,2241.28 5036.42,2273.98 ; Q5.1 5001.57,3242.51 5033.11,3274.05
  Top Layer w10: C5_UR2.2 4981.2,2657.01 4981.2,2598.78 Q3_UR2.1 ; C5_UR1.2 4987.03,3709.39 4987.03,3651.16 Q3_UR1.1
  Top Layer w30: P5.3@4546.94,4115.39 P5.3@4553.1,4109.22 ; P5.3@4558.26,4117.21 4558.26,4051.91 4615.52,3994.65 4964.25,3994.65 5036.42,3922.48 5036.42,3678.23 ; C6_UR1.2 4871.03,3772.29 4921.84,3721.48 C5_UR1.2 4993.16,3721.48 5036.42,3678.23 ; C6_UR2.2@4865.2,2719.92 4916.01,2669.1 C5_UR2.2 4987.33,2669.1 5030.59,2625.85 ; 5036.42,2273.98 5036.42,3351.82 5036.42,3678.23
pads on no net: U3.8 U3.9 U3.10 U3.11 U3.12 U3.13 U7.8 U7.9 U7.10 U7.11 U7.12 U7.13
copper on no net:
  other v1: 3212.88,2161.08 3335.5,2496.35 2352.16,3192.79

## Polygon pours and split planes (outlines as drawn)
GND on Bottom Layer "TopLayer-No Net" (solid, remove dead copper, pour order 2): 2203,4301 2205,4299 2205,1897

## Keep-outs
Keep-Out Layer:
  lines w20: 2203,1897 2203,4301 6044,4301 ; 2205,1897 6044,1897 6044,4299

## Other copper
Top Layer:
  rectangle net H_SIG2: 3396.28,2550.46 3553.1,2915.28
  rectangle net L_SIG2: 3399.5,2053.63 3554.67,2439.97
  rectangle net H_SIG1: 3388.41,3575.25 3548.33,3917.26
  rectangle net L_SIG1: 3393.16,3101.82 3554.67,3421.67
  rectangle net GND: 5353.89,3885.25 5698.47,3930.15
  rectangle net GND: 4505.85,3832.93 4862.62,3863.21
  rectangle net GND: 4493.74,2776.36 4856.99,2822.27
  rectangle net GND: 3186.65,2357.63 3214.73,2469.96
  rectangle net GND: 2497.37,3495.92 2644.43,3555.01
  rectangle net GND: 2296.03,2162.56 2607.92,2192.37
  rectangle net GND: 2321.19,2767.1 2537.94,2815
  rectangle net NetD6_2: 2786.06,2408.52 2876.65,2437.33
  rectangle net GND: 5127.98,3545.74 5187.36,3643.42
  rectangle net OSC: 2785,2832 2935,2883
  region net NetL2_1: 5717.77,2987.06 5253.79,2987.06 5253.79,2890.58 5717.77,2890.58
  rectangle net NetC21_1: 5117.34,3758.02 5196.95,4204.12
  rectangle net NetC20_2: 5349,4006.11 5409.53,4161.02
  rectangle net ICOIL: 5695.82,4052.16 5875.34,4083.22
  rectangle net ICOIL: 5684.02,4072.57 5713.5,4167.33
  rectangle net NetC22_1: 5775.09,3981.88 5878.37,4005
  rectangle net NetC20_2: 5378.46,3965.94 5712.34,4013.08
  rectangle net ICOIL: 5533.28,4060.22 5710.04,4122.01
  rectangle net NetD3_UR1_2: 4399.55,3242.17 4468.44,3369.21
  rectangle net NetD3_UR1_2: 4306.51,3337 4467.1,3370.78
  rectangle net NetC4_UR1_1: 3964.98,3430.07 4195.94,3476.69
  rectangle net NetC4_UR1_2: 4087.84,3336.76 4252.72,3370.3
  rectangle net VAMP: 4596.18,3755.89 4859.97,3788.87
  rectangle net NetC4_UR2_2: 4082.01,2284.38 4246.9,2317.92
  rectangle net NetC4_UR2_1: 3959.15,2377.7 4190.11,2424.31
  rectangle net NetD3_UR2_2: 4300.68,2284.62 4461.27,2318.4
  rectangle net NetD3_UR2_2: 4393.73,2189.79 4462.61,2316.83
  rectangle net VAMP: 4589.69,2700.19 4854.32,2736.09
  rectangle net NetL5_1: 5224.24,1976.83 5753.94,2067.84
  rectangle net OUT_UR2: 5478.25,2486.52 5800.37,2552.07
  rectangle net OUT_UR2: 5769.79,2461.29 5877.21,2512.67
Bottom Layer:
  rectangle net ICOIL: 4734.04,4111.79 4775.14,4283.75
  rectangle net QIMODE: 4636.71,4110.81 4677.81,4282.76
  rectangle net VAMP: 4535.05,4112.67 4576.15,4284.62
  rectangle net GND: 4432.4,4110.81 4473.5,4282.76
  rectangle net A4WPMODE: 4334.48,4112.67 4375.58,4284.62
  rectangle net NCLR: 4234.19,4112.67 4275.29,4284.62
  rectangle net 5V: 4137.84,4109.72 4178.94,4281.67
  rectangle net NetC25_1: 5871.3,3494.57 6002.41,3742.81

## Silkscreen, mask and mechanical layers (free items; w line width, h text height)
Top Overlay:
  text "Resonance A4WP-AA0" at 2263.66,4182.25 h50
  text "2017-10-06" at 2256.76,4037.32 h50
Top Paste:
  rectangle: 4137.39,4223.97 4179.57,4286.13
Bottom Paste:
  rectangle: 4734.11,4223.08 4776.29,4285.79
  rectangle: 4636.87,4221.75 4679.05,4284.46
  rectangle: 4334.41,4221.75 4376.59,4284.46
  rectangle: 4535.31,4222.3 4577.49,4285.02
  rectangle: 4432.09,4222.3 4474.26,4285.02
  rectangle: 4234.51,4222.3 4276.69,4285.02
Bottom Solder:
  rectangle: 4231.16,4210.48 4278.44,4283.72
  rectangle: 4335.32,4211.96 4376.68,4284.07
  rectangle: 4429.87,4206.79 4479.36,4284.76
  rectangle: 4531.81,4212.7 4582.78,4285.45
  rectangle: 4635.22,4217.13 4680.28,4285.09
  rectangle: 4735.68,4218.61 4774.83,4285.83
Mechanical 15:
  lines w10: 2201.4,4329.6 2201.42,4349.6 ; 2261.39,4319.54 2201.41,4339.6 ; 2261.43,4359.54 2201.41,4339.6 ; 3727.22,4338.08 2201.41,4339.6 ; 4518.98,4337.29 6044.79,4335.77 ; 5984.77,4315.83 6044.79,4335.77 ; 5984.81,4355.83 6044.79,4335.77 ; 6044.78,4325.77 6044.8,4345.77
  lines w20: 2202.82,3006.74 2714.99,3006.74 ; 2724.51,1909.77 2724.51,4294.18 ; 3088.37,4287.7 3105.36,1906.02 ; 3815.8,1902.3 3815.8,4290.44 ; 3821.61,2923.36 5019.29,2923.36 ; 4776.17,3664.4 6037.72,3664.4 ; 5034.38,1885.54 5034.38,4273.68 ; 5115.9,2010.32 5115.9,3161.65 ; 5488.33,2020.84 5488.33,3083.56
  text "3843.374 (mil)" at 3737.19,4302.08 h60 r359.94